# Altium PCB STM32F302VC_EVM.PcbDoc (part 1 of 19)
Units mil, origin at the board's own origin, x right, y up, seen from the top; angles counter-clockwise.
Board outline 3937.01 x 3937.01 mil, 2 copper layers (Top Layer, Bottom Layer); 117 components, 166 nets, 602 pads, 373 vias.
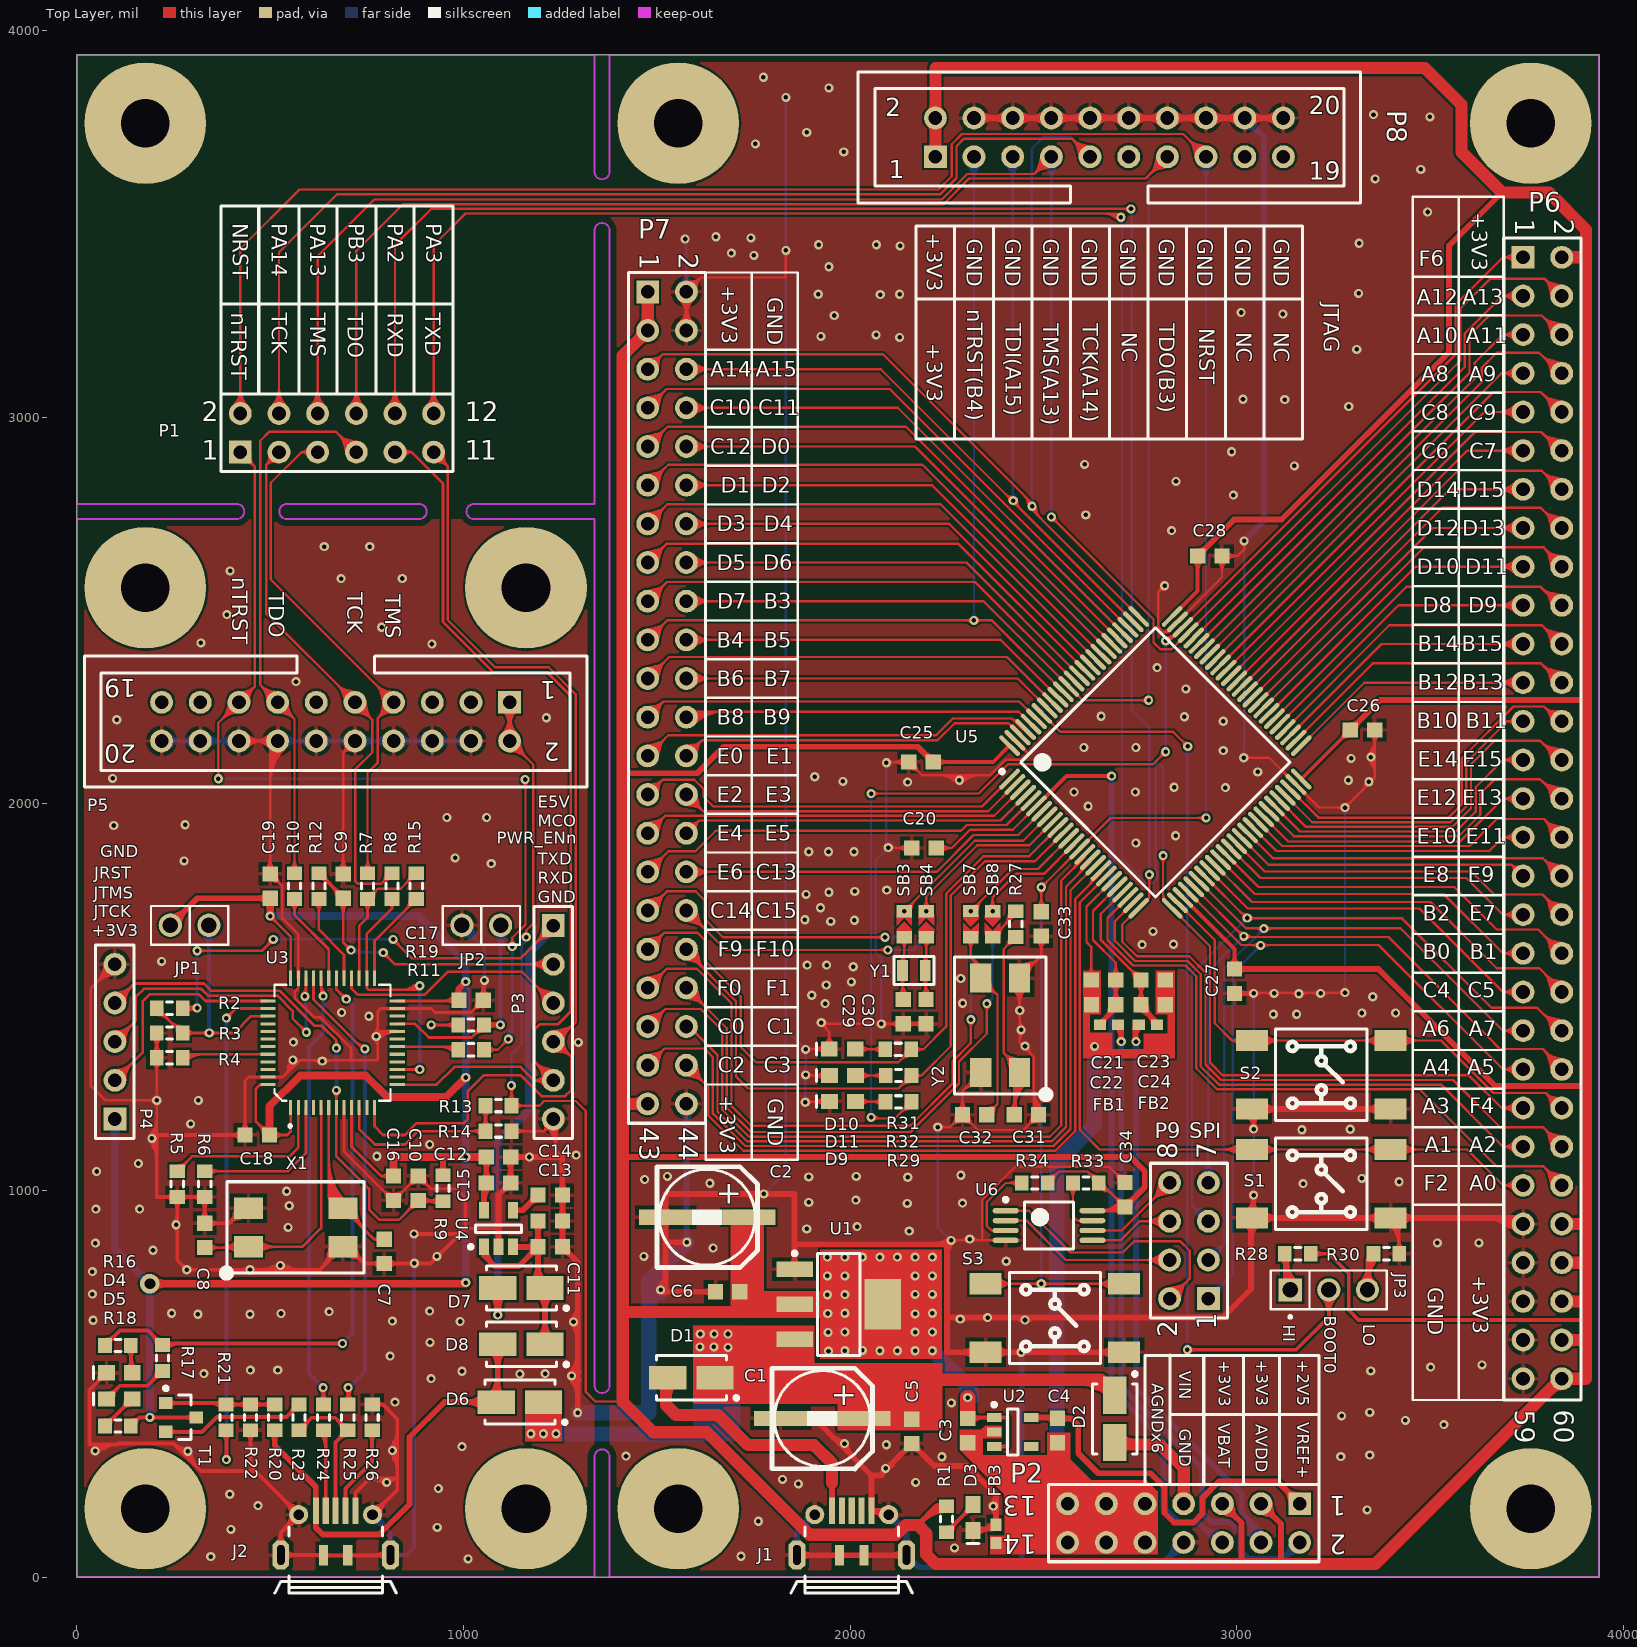
[diagram p0: Top Layer view]
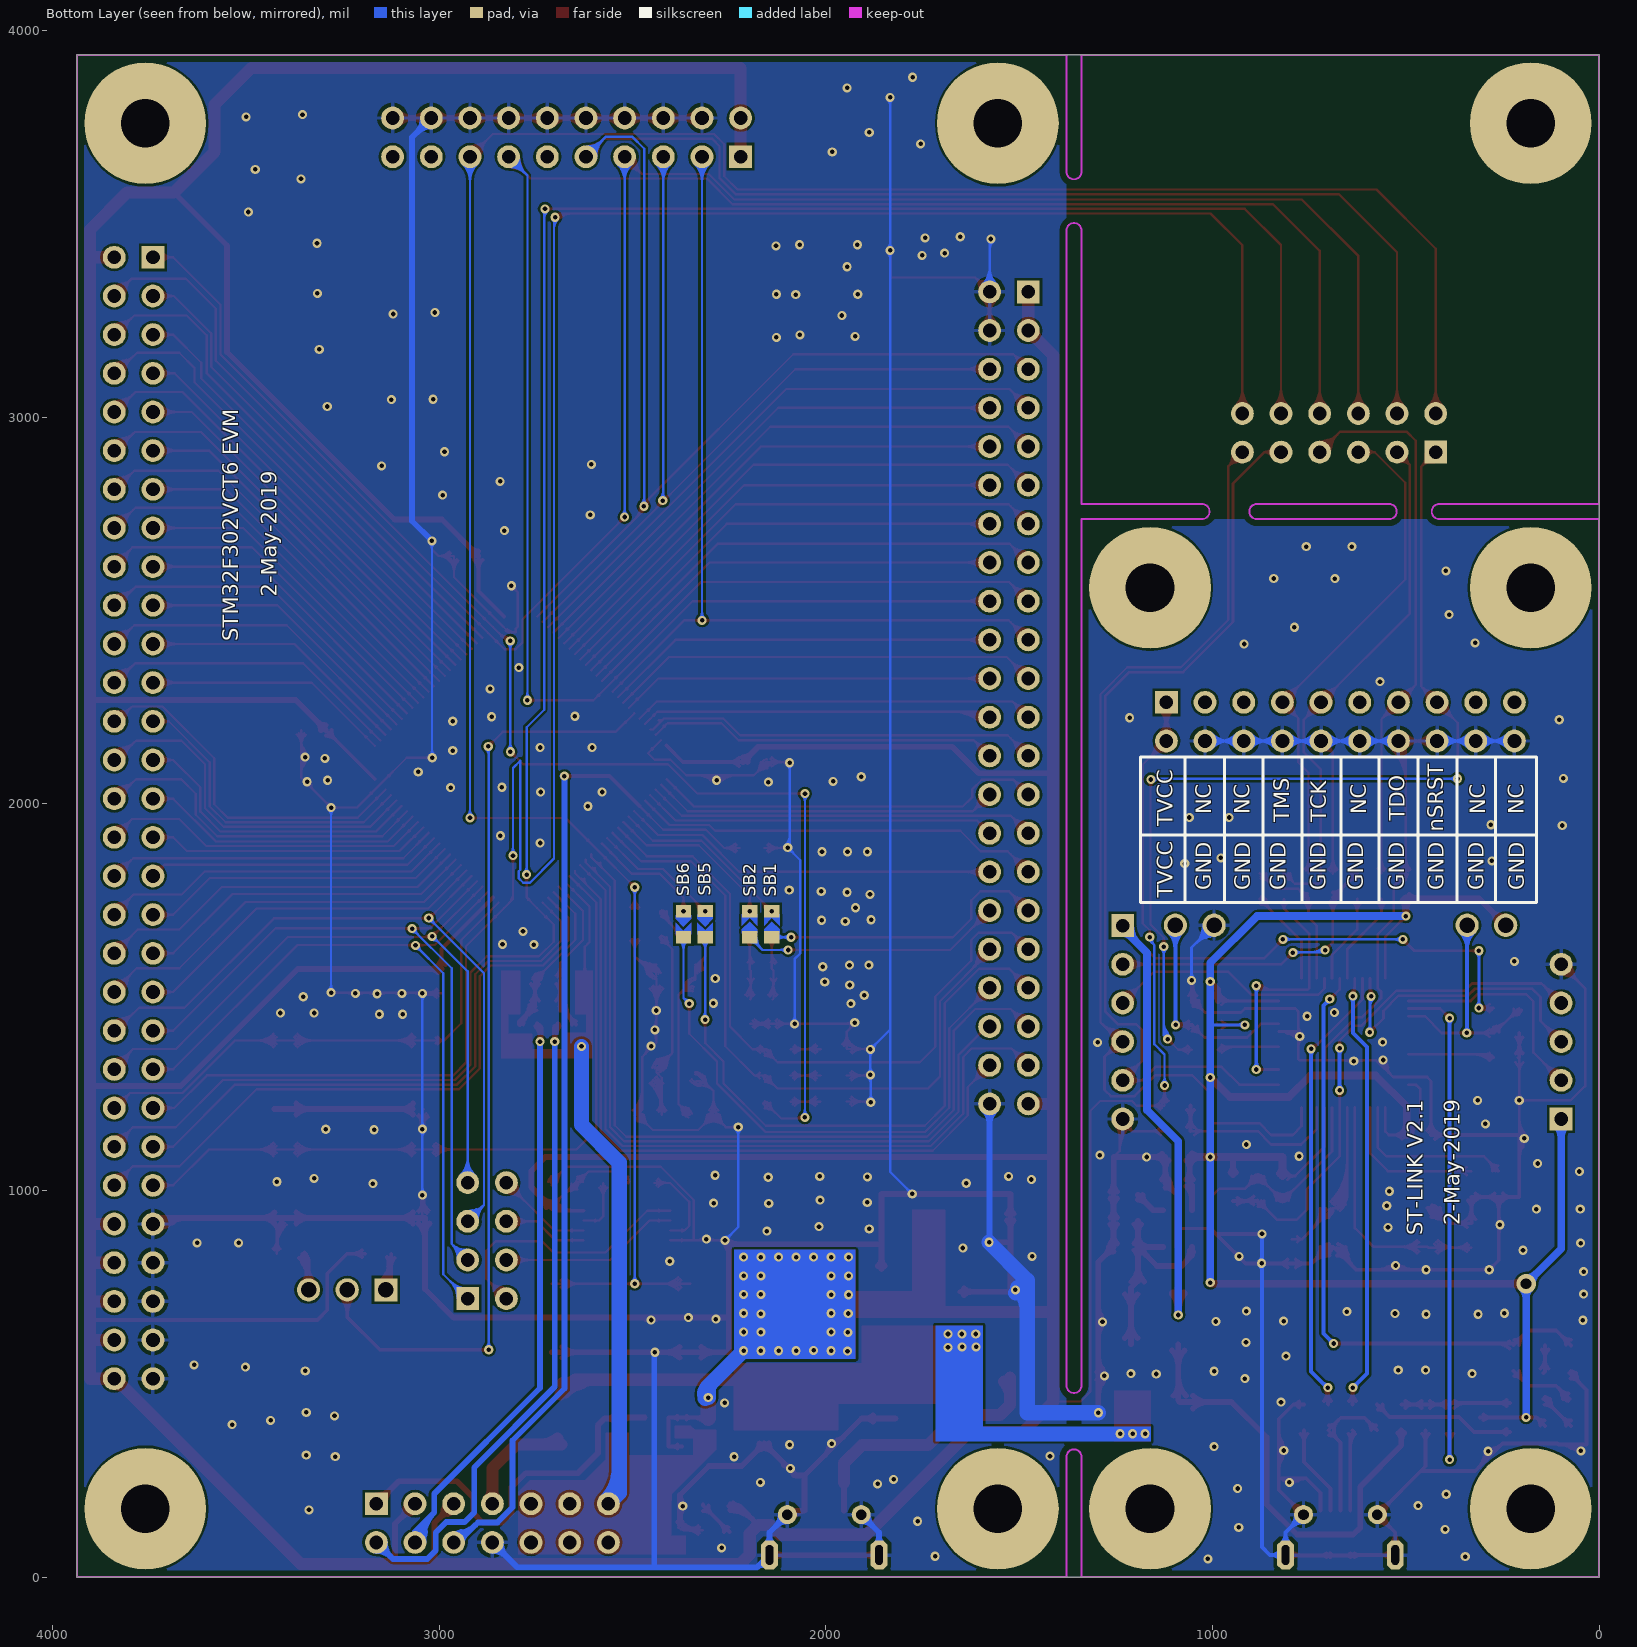
[diagram p1: Bottom Layer view, seen from below]

## Layer stack, top to bottom
Top Layer: signal copper 1.4
Dielectric: dielectric 12.6, FR-4, Dk 4.8
Bottom Layer: signal copper 1.4

## Board outline
0,3937.01 0,0 3937.01,0 3937.01,3937.01 0,3937.01

## Design rules (kind name [scope] priority, off if disabled: settings)
Clearance Clearance_keepout [All vs OnLayer('Keep-Out Layer')] p1: gap=15.75
Clearance [All] p2: gap=6
HoleSize [All] p1: absolutevalues=TRUE maxlimit=248.03 minlimit=7.87 maxpercent=80.000 minpercent=20.000
MinimumSolderMaskSliver [All] p1: minsoldermaskwidth=0
PolygonConnect PolygonConnect_ViaHole [IsVia] p1: connectstyle=Direct reliefconductorwidth=10 reliefentries=4 polygonreliefangle="90 Angle" airgapwidth=10
PolygonConnect [All] p2: connectstyle=Relief reliefconductorwidth=10 reliefentries=4 polygonreliefangle="90 Angle" airgapwidth=10
RoutingVias [All] p1: holewidth=11.81 width=23.62 viastyle="Through Hole" minholewidth=11.81 minwidth=23.62 maxholewidth=248.03 maxwidth=50
SilkToSilkClearance [All] p1: silktosilkclearance=0
SilkToSolderMaskClearance [IsPad] p1: minsilkscreentomaskgap=0 clearancetoexposedcopper=TRUE
SolderMaskExpansion [All] p1: expansion=4
Width [All] p1: maxlimit=50 minlimit=5 preferedwidth=10
24 further rules are at their usual default settings.

## Classes and differential pairs
component class STM32F302VC_EVM: P1
component class ST_LINK_V2-1: C7 C8 C9 C10 C11 C12 C13 C14 C15 C16 C17 C18 C19 D4 D5 D6 D7 D8 J2 JP1 JP2 P3 P4 P5 R2 R3 R4 R5 R6 R7 R8 R9 R10 R11 R12 R13 R14 R15 R16 R17 R18 R19 R20 R21 R22 R23 R24 R25 R26 T1 U3 U4 X1
component class PowerMgt: C1 C2 C3 C4 C5 C6 D1 D2 D3 FB1 FB2 FB3 J1 P2 R1 U1 U2
component class MCU: C20 C21 C22 C23 C24 C25 C26 C27 C28 C29 C30 C31 C32 C33 C34 D9 D10 D11 JP3 P6 P7 P8 P9 R27 R28 R29 R30 R31 R32 R33 R34 S1 S2 S3 SB1 SB2 SB3 SB4 SB5 SB6 SB7 SB8 U5 U6 Y1 Y2

## Components (designator, comment, footprint, x,y, rotation, side; value= is the part's Value field where it differs from the comment)
C1 "220uF" SMD-EC-F6.3 2035.43,410.43 r180 top
C2 "220uF" SMD-EC-F6.3 1738.19,931.1 r180 top
C3 "1uF" CAPC1608N 2304.13,378.94 r90 top
C4 "1uF" CAPC1608N 2536.42,379.33 r90 top
C5 "100nF" CAPC1608N 2159.45,376.97 r90 top
C6 "100nF" CAPC1608N 1683.07,738.19 r0 top
C7 "20pF" CAPC1608N 795.28,842.52 r270 top
C8 "20pF" CAPC1608N 330.71,883.86 r90 top
C9 "20pF" CAPC1608N 688.98,1787.4 r90 top
C10 "100nF" CAPC1608N 882.87,1005.91 r270 top
C11 "1uF" CAPC1608N 1224.41,854.33 r180 top
C12 "1uF" CAPC1608N 1090.55,1086.61 r180 top
C13 "100nF" CAPC1608N 1224.41,921.26 r180 top
C14 "10nF" CAPC1608N 1224.41,988.19 r180 top
C15 "100nF" CAPC1608N 1090.55,1019.68 r180 top
C16 "100nF" CAPC1608N 818.9,1005.91 r90 top
C17 "100nF" CAPC1608N 1019.68,1492.13 r180 top
C18 "100nF" CAPC1608N 466.54,1143.7 r0 top
C19 "100nF" CAPC1608N 500,1787.4 r270 top
C20 "100nF" CAPC1608N 2190.94,1885.83 r0 top
C21 "10nF" CAPC1608N 2655,1544.18 r0 top
C22 "1uF" CAPC1608N 2655.51,1480.33 r0 top
C23 "10nF" CAPC1608N 2783.46,1544.43 r180 top
C24 "1uF" CAPC1608N 2783.46,1480.45 r180 top
C25 "100nF" CAPC1608N 2183.07,2108.27 r0 top
C26 "100nF" CAPC1608N 3324.8,2190.94 r180 top
C27 "100nF" CAPC1608N 2994.09,1541.34 r90 top
C28 "100nF" CAPC1608N 2930.12,2640.75 r180 top
C29 "4.3pF" CAPC1608N 2137.17,1462.6 r90 top
C30 "4.3pF" CAPC1608N 2196.22,1462.6 r90 top
C31 "20pF" CAPC1608N 2455.71,1195.87 r180 top
C32 "20pF" CAPC1608N 2321.85,1195.87 r0 top
C33 "100nF" CAPC1608N 2494.09,1689.35 r90 top
C34 "100nF" CAPC1608N 2710.76,989.17 r270 top
D1 "STPS2L30A" DIOM4326X25N 1589.57,515.75 r180 top
D2 "STPS2L30A" DIOM4326X25N 2684.06,409.45 r270 top
D3 "LED-SMD0603-R" CD1608-0603 2317.91,154.53 r270 top
D4 "LED-SMD0603-R" CD1608-0603 110.17,528.54 r180 top
D5 "LED-SMD0603-G" CD1608-0603 110.17,460.63 r180 top
D6 "STPS2L30A" DIOM4326X25N 1145.67,452.76 r180 top
D7 "STPS2L30A" DIOM4326X25N 1149.61,748.03 r180 top
D8 "STPS2L30A" DIOM4326X25N 1149.61,602.36 r180 top
D9 "LED-SMD0603-R" CD1608-0603 1980.19,1230.32 r180 top
D10 "LED-SMD0603-G" CD1608-0603 1979.33,1366.14 r180 top
D11 "LED-SMD0603-B" CD1608-0603 1980.01,1297.24 r180 top
FB1 "BLM15PX800SN1D" FBC1005N 2669.29,1429.13 r180 top
FB2 "BLM15PX800SN1D" FBC1005N 2769.68,1429.13 r0 top
FB3 "BLM15PX800SN1D" FBC1005N 2376.97,112.2 r270 top
J1 "ZX62D-B-5P8(30)" USB2.0-4H5 2003.94,94.49 r0 top
J2 "ZX62D-B-5P8(30)" USB2.0-4H5 669.29,94.49 r0 top locked
JP1 "JP2" SIP2/2.54 241.76,1686.02 r0 top
JP2 "JP2" SIP2/2.54 996.06,1686.02 r0 top
JP3 "JP3" SIP3/2.54 3137.8,743.11 r0 top
P1 "Header 6X2" HDR2X6 422.83,2909.45 r0 top
P2 "PWR" HDR2X7 3162.4,189.96 r180 top
P3 "Header 6" HDR1X6 1232.28,1685.04 r270 top
P4 "Header 5" HDR1X5 98.43,1185.04 r90 top
P5 "JTAG/SWD" HDR2X10/T2.54/B2C 669.29,2212.6 r180 top
P6 "Header 30X2" HDR2X30 3740.16,3413.39 r270 top
P7 "Header 22X2" HDR2X22 1476.38,3324.02 r270 top
P8 "JTAG/SWD" HDR2X10/T2.54/B2C 2670.28,3723.43 r0 top
P9 "JP_EEPROM" HDR2X4 2926.18,720.47 r90 top
R1 "1K" RESC1608N 2249.02,150.1 r270 top
R2 "2K7" RESC1608N 240.16,1471.46 r180 top
R3 "4K7" RESC1608N 240.16,1407.48 r180 top
R4 "100K" RESC1608N 240.16,1343.5 r0 top
R5 "10K" RESC1608N 259.84,1016.73 r90 top
R6 "10K" RESC1608N 330.71,1016.73 r90 top
R7 "22" RESC1608N 751.97,1787.4 r90 top
R8 "22" RESC1608N 814.96,1787.4 r90 top
R9 "100K" RESC1608N 946.85,1005.91 r90 top
R10 "22" RESC1608N 562.99,1787.4 r90 top
R11 "22" RESC1608N 1019.68,1364.17 r0 top
R12 "100" RESC1608N 625.98,1787.4 r90 top
R13 "4K7" RESC1608N 1090.55,1219.49 r180 top
R14 "4K7" RESC1608N 1090.55,1153.54 r180 top
R15 "100" RESC1608N 877.95,1787.4 r90 top
R16 "100" RESC1608N 106.3,599.41 r180 top
R17 "100" RESC1608N 221.46,566.93 r90 top
R18 "0" RESC1608N 106.3,390.75 r180 top
R19 "[N/A]" RESC1608N 1019.68,1428.15 r0 top
R20 "10K" RESC1608N 511.81,413.39 r270 top
R21 "100" RESC1608N 385.83,413.39 r270 top
R22 "36K" RESC1608N 448.82,413.39 r90 top
R23 "1K5" RESC1608N 574.8,413.39 r90 top
R24 "0" RESC1608N 637.8,413.39 r90 top
R25 "0" RESC1608N 700.79,413.39 r90 top
R26 "100K" RESC1608N 763.78,413.39 r90 top
R27 "0" RESC1608N 2428.15,1688.98 r90 top
R28 "10K" RESC1608N 3157.48,836.61 r0 top
R29 "1K" RESC1608N 2125,1229.33 r180 top
R30 "10K" RESC1608N 3386.81,836.61 r0 top
R31 "1K" RESC1608N 2124.14,1365.16 r180 top
R32 "1K" RESC1608N 2125.13,1297.24 r180 top
R33 "10K" RESC1608N 2609.45,1019.68 r0 top
R34 "10K" RESC1608N 2477.36,1019.68 r180 top
S1 "FSM4JSMASTR" SW_4PIN_S_6.0X6.0MM 3218.5,1017.72 r270 top
S2 "FSM4JSMASTR" SW_4PIN_S_6.0X6.0MM 3218.5,1299.21 r270 top
S3 "FSM4JSMASTR" SW_4PIN_S_6.0X6.0MM 2529.53,670.28 r270 top
SB1 "Circuit Breaker" JP2_SMD 2139.76,1688.84 r270 bottom
SB2 "Circuit Breaker" JP2_SMD 2196.85,1688.84 r270 bottom
SB3 "Circuit Breaker" JP2_SMD 2139.76,1688.84 r270 top
SB4 "Circuit Breaker" JP2_SMD 2196.85,1688.84 r270 top
SB5 "Circuit Breaker" JP2_SMD 2312.01,1688.98 r90 bottom
SB6 "Circuit Breaker" JP2_SMD 2368.11,1688.63 r90 bottom
SB7 "Circuit Breaker" JP2_SMD 2312.01,1688.98 r90 top
SB8 "Circuit Breaker" JP2_SMD 2368.11,1688.63 r90 top
T1 "MMBT3904LT1G" ONSC-SOT-23-3-318-08_V 269.68,413.39 r0 top
U1 "LD1117S33TR" SOT-223_N 1970.47,705.71 r0 top
U2 "LDLN025M25R" SOT95P280X145-5N 2420.28,375.39 r0 top
U3 "STM32F103CBT6" "QFP48 7X7" 661.42,1381.89 r0 top
U4 "LD3985M33R" SOT23-5L_N 1090.55,901.57 r90 top
U5 "STM32F302VCT6" STM-LQFP100_N 2789.37,2107.28 r45 top
U6 "M95640-WDW6TP" TSOP65P640X120-8N 2514.25,909.45 r0 top
X1 "8MHz" 12SMX-B-N 565.94,904.53 r0 top
Y1 "32.768kHz" FC-12M 2164.72,1568.9 r180 top
Y2 "8MHz" 12SMX-B-N 2387.8,1427.04 r90 top

## Footprints (in the part's own frame and the unit in brackets; to place one, negate y for a bottom-side part, rotate by r counter-clockwise, add the part's x,y. Pads: shape width x height; smd on the part's side, far side on the other; paste and mask are expansions set on the pad)
12SMX-B-N [mm] "SMD 4-Pin, Body 7x5mm, IPC Medium Density"
  rect 1.9x1.4 smd: 1(-3.1,-1.27) 2(3.1,-1.27) 3(3.1,1.27) 4(-3.1,1.27)
  silkscreen extent -4.64,-3.1 4.5,3, body extent -3.5,-2.5 3.5,2.5, height 0.6
CAPC1608N [mm] "Chip Capacitor, Body 1.6x0.8mm, IPC Medium Density"
  rect 1x1 smd: 1(-0.8,0) 2(0.8,0)
  body extent -0.87,-0.48 0.87,0.48, height 0.85
CD1608-0603 [mm] "Chip Diode; Body 1.6 x 0.8 mm (LxW typ)"
  rect 1.1x1 smd: 1(-0.85,0) 2(0.85,0)
  silkscreen extent 1.7,-0.4 1.7,0.4
DIOM4326X25N [mm] "Molded Diode, 2-Leads, Body 4.27x2.57mm, IPC Medium Density"
  rect 2.45x1.55 smd: 1(-1.55,0) 2(1.55,0)
  silkscreen extent -3.08,-1.45 2.3,1.45, body extent -2.3,-1.45 2.3,1.45, height 2.45
FBC1005N [mm] "Chip Ferrite Bead, Body 1.1x0.5mm, IPC Medium Density"
  rect 0.8x0.7 smd: 1(-0.6,0) 2(0.6,0)
  body extent -0.55,-0.3 0.55,0.3, height 0.4
FC-12M [mm] "Chip Crystal, SMD 2-Pin, Body 2.05x1.20mm, IPC Medium Density"
  rect 0.7x1.4 smd: 1(-0.75,0) 2(0.75,0)
  silkscreen extent -1.32,-0.91 1.32,0.91, body extent -1.03,-0.6 1.02,0.6, height 0.55
HDR1X5 [mm] "Connector; Header; 5 Position"
  rect 1.5x1.5 hole 0.9: 1(0,0)
  round 1.5 hole 0.9: 2(2.54,0) 3(5.08,0) 4(7.62,0) 5(10.16,0)
  silkscreen extent -1.27,-1.27 11.43,1.27
HDR1X6 [mm] "Connector; Header; 6 Position"
  rect 1.5x1.5 hole 0.9: 1(0,0)
  round 1.5 hole 0.9: 2(2.54,0) 3(5.08,0) 4(7.62,0) 5(10.16,0) 6(12.7,0)
  silkscreen extent -1.27,-1.27 13.97,1.27
HDR2X4 [mm] "Connector; Header; 4x2 Position"
  rect 1.5x1.5 hole 0.9: 1(0,0)
  round 1.5 hole 0.9: 2(0,2.54) 3(2.54,0) 4(2.54,2.54) 5(5.08,0) 6(5.08,2.54) 7(7.62,0) 8(7.62,2.54)
  silkscreen extent -1.27,-1.27 8.89,3.81
HDR2X6 [mm] "Connector; Header; 6x2 Position"
  rect 1.5x1.5 hole 0.9: 1(0,0)
  round 1.5 hole 0.9: 2(0,2.54) 3(2.54,0) 4(2.54,2.54) 5(5.08,0) 6(5.08,2.54) 7(7.62,0) 8(7.62,2.54) 9(10.16,0) 10(10.16,2.54) 11(12.7,0) 12(12.7,2.54)
  silkscreen extent -1.27,-1.27 13.97,3.81
HDR2X7 [mm] "Connector; Header; 7x2 Position"
  rect 1.5x1.5 hole 0.9: 1(0,0)
  round 1.5 hole 0.9: 2(0,2.54) 3(2.54,0) 4(2.54,2.54) 5(5.08,0) 6(5.08,2.54) 7(7.62,0) 8(7.62,2.54) 9(10.16,0) 10(10.16,2.54) 11(12.7,0) 12(12.7,2.54) 13(15.24,0) 14(15.24,2.54)
  silkscreen extent -1.27,-1.27 16.51,3.81
HDR2X10/T2.54/B2C [mm] "Connector; Header; 10x2 Position; Pitch 2.54mm; Style Board to Cable;"
  rect 1.5x1.5 hole 0.9: 1(-11.43,-1.27)
  round 1.5 hole 0.9: 2(-11.43,1.27) 3(-8.89,-1.27) 4(-8.89,1.27) 5(-6.35,-1.27) 6(-6.35,1.27) 7(-3.81,-1.27) 8(-3.81,1.27) 9(-1.27,-1.27) 10(-1.27,1.27) 11(1.27,-1.27) 12(1.27,1.27) 13(3.81,-1.27) 14(3.81,1.27) 15(6.35,-1.27) 16(6.35,1.27) 17(8.89,-1.27) 18(8.89,1.27) 19(11.43,-1.27) 20(11.43,1.27)
  silkscreen extent -16.5,-4.3 16.5,4.3
HDR2X22 [mm] "Connector; Header; 22x2 Position"
  rect 1.5x1.5 hole 0.9: 1(0,0)
  round 1.5 hole 0.9: 2(0,2.54) 3(2.54,0) 4(2.54,2.54) 5(5.08,0) 6(5.08,2.54) 7(7.62,0) 8(7.62,2.54) 9(10.16,0) 10(10.16,2.54) 11(12.7,0) 12(12.7,2.54) 13(15.24,0) 14(15.24,2.54) 15(17.78,0) 16(17.78,2.54) 17(20.32,0) 18(20.32,2.54) 19(22.86,0) 20(22.86,2.54) 21(25.4,0) 22(25.4,2.54) 23(27.94,0) 24(27.94,2.54) 25(30.48,0) 26(30.48,2.54) 27(33.02,0) 28(33.02,2.54) 29(35.56,0) 30(35.56,2.54) 31(38.1,0) 32(38.1,2.54) 33(40.64,0) 34(40.64,2.54) 35(43.18,0) 36(43.18,2.54) 37(45.72,0) 38(45.72,2.54) 39(48.26,0) 40(48.26,2.54) 41(50.8,0) 42(50.8,2.54) 43(53.34,0) 44(53.34,2.54)
  silkscreen extent -1.27,-1.27 54.61,3.81
HDR2X30 [mm] "Connector; Header; 30x2 Position"
  rect 1.5x1.5 hole 0.9: 1(0,0)
  round 1.5 hole 0.9: 2(0,2.54) 3(2.54,0) 4(2.54,2.54) 5(5.08,0) 6(5.08,2.54) 7(7.62,0) 8(7.62,2.54) 9(10.16,0) 10(10.16,2.54) 11(12.7,0) 12(12.7,2.54) 13(15.24,0) 14(15.24,2.54) 15(17.78,0) 16(17.78,2.54) 17(20.32,0) 18(20.32,2.54) 19(22.86,0) 20(22.86,2.54) 21(25.4,0) 22(25.4,2.54) 23(27.94,0) 24(27.94,2.54) 25(30.48,0) 26(30.48,2.54) 27(33.02,0) 28(33.02,2.54) 29(35.56,0) 30(35.56,2.54) 31(38.1,0) 32(38.1,2.54) 33(40.64,0) 34(40.64,2.54) 35(43.18,0) 36(43.18,2.54) 37(45.72,0) 38(45.72,2.54) 39(48.26,0) 40(48.26,2.54) 41(50.8,0) 42(50.8,2.54) 43(53.34,0) 44(53.34,2.54) 45(55.88,0) 46(55.88,2.54) 47(58.42,0) 48(58.42,2.54) 49(60.96,0) 50(60.96,2.54) 51(63.5,0) 52(63.5,2.54) 53(66.04,0) 54(66.04,2.54) 55(68.58,0) 56(68.58,2.54) 57(71.12,0) 58(71.12,2.54) 59(73.66,0) 60(73.66,2.54)
  silkscreen extent -1.27,-1.27 75.06,3.81
JP2_SMD [mil]
  rect 32x40 smd: 1(33.75,0) 2(-33.75,0)
  Top Layer region: -26.25,0 -16.25,0 3.75,-20 -26.25,-20
  Top Layer region: -26.25,0 -16.25,0 3.75,20 -26.25,20
  Top Layer region: 23.75,20 13.75,20 -6.25,0 13.75,-20 23.75,-20
ONSC-SOT-23-3-318-08_V [mm] "SOT23, 3-Leads, Body 2.92x1.3mm, Pitch 0.95mm"
  rect 0.9x0.8 smd: 1(-1,0.95) 2(-1,-0.95) 3(1,0)
  silkscreen extent -1.12,-1.46 0.65,2.02, body extent -0.65,-1.46 0.65,1.46, height 1.11
"QFP48 7X7" [mm] "TSQFP, 48-Leads, Body 7.0x7.0mm (max), Pitch 0.50mm, IPC Medium Density"
  rect 0.2x1 smd: 1(-2.75,-4.25) 2(-2.25,-4.25) 3(-1.75,-4.25) 4(-1.25,-4.25) 5(-0.75,-4.25) 6(-0.25,-4.25) 7(0.25,-4.25) 8(0.75,-4.25) 9(1.25,-4.25) 10(1.75,-4.25) 11(2.25,-4.25) 12(2.75,-4.25) 25(2.75,4.25) 26(2.25,4.25) 27(1.75,4.25) 28(1.25,4.25) 29(0.75,4.25) 30(0.25,4.25) 31(-0.25,4.25) 32(-0.75,4.25) 33(-1.25,4.25) 34(-1.75,4.25) 35(-2.25,4.25) 36(-2.75,4.25)
  rect 1x0.2 smd: 13(4.25,-2.75) 14(4.25,-2.25) 15(4.25,-1.75) 16(4.25,-1.25) 17(4.25,-0.75) 18(4.25,-0.25) 19(4.25,0.25) 20(4.25,0.75) 21(4.25,1.25) 22(4.25,1.75) 23(4.25,2.25) 24(4.25,2.75) 37(-4.25,2.75) 38(-4.25,2.25) 39(-4.25,1.75) 40(-4.25,1.25) 41(-4.25,0.75) 42(-4.25,0.25) 43(-4.25,-0.25) 44(-4.25,-0.75) 45(-4.25,-1.25) 46(-4.25,-1.75) 47(-4.25,-2.25) 48(-4.25,-2.75)
  silkscreen extent -3.81,-5.52 3.81,3.81
RESC1608N [mm] "Chip Resistor, Body 1.6x0.8mm, IPC Medium Density"
  rect 0.9x1 smd: 1(-0.85,0) 2(0.85,0)
  silkscreen extent -0.2,-0.4 0.2,0.4, body extent -0.85,-0.48 0.85,0.48, height 0.6
SIP2/2.54 [mil]
  round 60 hole 40: 1(0,0) 2(100,0)
  silkscreen extent -50,-50 150,50
SIP3/2.54 [mil]
  rect 60x60 hole 40: 1(0,0)
  round 60 hole 40: 2(100,0) 3(200,0)
  silkscreen extent -50,-72 250,50
SMD-EC-F6.3 [mm]
  rect 3.5x1 smd: 1(0,0) 2(5.475,0)
  silkscreen extent -0.56,-3.31 6.04,3.31
SOT23-5L_N [mm] "SOT23, 5-Leads, Body 2.9x1.6mm, Pitch 0.95mm, Lead Span 2.8mm, IPC Medium Density"
  rect 1.1x0.65 smd: 1(-1.2,0.95) 2(-1.2,0) 3(-1.2,-0.95) 4(1.2,-0.95) 5(1.2,0.95)
  silkscreen extent -1.32,-1.5 0.25,1.95, body extent -0.87,-1.5 0.87,1.5, height 1.45
SOT95P280X145-5N [mm] "SOT23, 5-Leads, Body 2.95x2.80mm, Pitch 0.95mm, IPC Medium Density"
  rect 0.95x0.6 smd: 1(-1.225,0.95) 2(-1.225,0) 3(-1.225,-0.95) 4(1.225,-0.95) 5(1.225,0.95)
  silkscreen extent -1.35,-1.5 0.35,1.92, body extent -0.8,-1.47 0.8,1.48, height 1.45
SOT-223_N [mm] "SOT223, 4-Leads, Body 6.5x3.5mm, Pitch 2.3mm, Lead Span 7mm, IPC Medium Density"
  rect 2.4x1 smd: 1(-2.9,2.3) 2(-2.9,0) 3(-2.9,-2.3)
  rect 2.4x3.3 smd: 4(2.9,0)
  silkscreen extent -3.02,-3.35 1.4,3.47, body extent -1.85,-3.35 1.85,3.35, height 1.8
STM-LQFP100_N [mm] "Thin QFP, 100-Leads, Body 14x14mm, Pitch 0.5mm, IPC Medium Density"
  oval 1.8x0.3 smd: 1(-7.55,6) 2(-7.55,5.5) 3(-7.55,5) 4(-7.55,4.5) 5(-7.55,4) 6(-7.55,3.5) 7(-7.55,3) 8(-7.55,2.5) 9(-7.55,2) 10(-7.55,1.5) 11(-7.55,1) 12(-7.55,0.5) 13(-7.55,0) 14(-7.55,-0.5) 15(-7.55,-1) 16(-7.55,-1.5) 17(-7.55,-2) 18(-7.55,-2.5) 19(-7.55,-3) 20(-7.55,-3.5) 21(-7.55,-4) 22(-7.55,-4.5) 23(-7.55,-5) 24(-7.55,-5.5) 25(-7.55,-6) 51(7.55,-6) 52(7.55,-5.5) 53(7.55,-5) 54(7.55,-4.5) 55(7.55,-4) 56(7.55,-3.5) 57(7.55,-3) 58(7.55,-2.5) 59(7.55,-2) 60(7.55,-1.5) 61(7.55,-1) 62(7.55,-0.5) 63(7.55,0) 64(7.55,0.5) 65(7.55,1) 66(7.55,1.5) 67(7.55,2) 68(7.55,2.5) 69(7.55,3) 70(7.55,3.5) 71(7.55,4) 72(7.55,4.5) 73(7.55,5) 74(7.55,5.5) 75(7.55,6)
  oval 0.3x1.8 smd: 26(-6,-7.55) 27(-5.5,-7.55) 28(-5,-7.55) 29(-4.5,-7.55) 30(-4,-7.55) 31(-3.5,-7.55) 32(-3,-7.55) 33(-2.5,-7.55) 34(-2,-7.55) 35(-1.5,-7.55) 36(-1,-7.55) 37(-0.5,-7.55) 38(0,-7.55) 39(0.5,-7.55) 40(1,-7.55) 41(1.5,-7.55) 42(2,-7.55) 43(2.5,-7.55) 44(3,-7.55) 45(3.5,-7.55) 46(4,-7.55) 47(4.5,-7.55) 48(5,-7.55) 49(5.5,-7.55) 50(6,-7.55) 76(6,7.55) 77(5.5,7.55) 78(5,7.55) 79(4.5,7.55) 80(4,7.55) 81(3.5,7.55) 82(3,7.55) 83(2.5,7.55) 84(2,7.55) 85(1.5,7.55) 86(1,7.55) 87(0.5,7.55) 88(0,7.55) 89(-0.5,7.55) 90(-1,7.55) 91(-1.5,7.55) 92(-2,7.55) 93(-2.5,7.55) 94(-3,7.55) 95(-3.5,7.55) 96(-4,7.55) 97(-4.5,7.55) 98(-5,7.55) 99(-5.5,7.55) 100(-6,7.55)
  silkscreen extent -7.67,-6.25 6.25,6.82, body extent -7,-7 7,7, height 1.6
SW_4PIN_S_6.0X6.0MM [mm] "SMD 4-Pin, Body 7x5mm, IPC Medium Density"
  rect 1.4x2.1 smd: 1(2.25,4.55) 2(2.25,-4.55) 3(-2.25,4.55) 4(-2.25,-4.55)
  silkscreen extent -3,-3 3,3, body extent -3,-3 3,3, height 0.6
TSOP65P640X120-8N [mm] "TSOP, 8-Leads, Body 3.00x4.40mm, Pitch 0.65mm, IPC Medium Density"
  oval 1.7x0.35 smd: 1(-2.85,0.975) 2(-2.85,0.325) 3(-2.85,-0.325) 4(-2.85,-0.975) 5(2.85,-0.975) 6(2.85,-0.325) 7(2.85,0.325) 8(2.85,0.975)
  silkscreen extent -2.97,-1.55 1.6,1.82, body extent -2.25,-1.55 2.25,1.55, height 1.2
USB2.0-4H5 [mm] "USB Micro B, 0.65mm Pitch, 4 holes"
  rect 0.4x1.75 smd: 1(-1.3,1.962) 2(-0.65,1.962) 3(0,1.962) 4(0.65,1.962) 5(1.3,1.962)
  oct 1.1x1.9 hole 0.5 slot 1.3 at 90 deg: 6(3.6,-0.938) 7(-3.6,-0.938)
  round 1.25 hole 0.7: 8(2.425,1.712) 9(-2.425,1.712)
  rect 0.6x1.35 smd: 10(0.8,-0.963) 11(-0.8,-0.963)
  silkscreen extent -4,-3.45 4,0.91, body extent -4,-3.46 4,2.36, height 16

## Part data
C1 C2: library part EEE-FPC221XAP, "220μF 16V Aluminum Electrolytic Capacitors Radial, Can - SMD 160 mohm @ 100kHz 2000 Hrs @ 105°C"
C3 C4 C5 C6 C7 C8 C9 C10 C11 C12 C13 C14 C15 C16 C17 C18 C19 C20 C21 C22 C23 C24 C25 C26 C27 C28 C29 C30 C31 C32 C33 C34: library part "Chip Capacitor", "Chip Capacitor"
D1 D2 D6 D7 D8: "Diode Schottky 30V 2A Surface Mount SMA"
D3 D4 D9: "Single Color LED Indication, 0603, Red"
D5 D10: "Single Color LED Indication, 0603, Green"
D11: "Single Color LED Indication, 0603, Blue"
FB1 FB2 FB3: library part "Ferrite Bead", "80 Ohms @ 100MHz 1 Power Line Ferrite Bead 0402 (1005 Metric) 2.3A 38mOhm"
J1 J2: "USB - micro B USB 2.0 Receptacle Connector 5-Pin"
JP1 JP2: "Jumper 2"
JP3: "Jumper 3"
P1: "Header, 6-Pin, Dual row"
P2: library part "Header 7X2", "Header, 7-Pin, Dual row"
P3: "Header, 6-Pin"
P4: "Header, 5-Pin"
P5 P8: library part JTAG, "Header, JTAG"
P6: "Header, 30-Pin, Dual row"
P7: "Header, 22-Pin, Dual row"
P9: library part "Header 4X2", "Header, 4-Pin, Dual row"
R1 R2 R3 R4 R5 R6 R7 R8 R9 R10 R11 R12 R13 R14 R15 R16 R17 R18 R19 R20 R21 R22 R23 R24 R25 R26 R27 R28 R29 R30 R31 R32 R33 R34: library part "Chip Resistor", "Chip Resistor"
S1 S2 S3: "Tactile Switch SPST-NO Top Actuated Surface Mount"
T1: "General Purpose Transistor, NPN Silicon, 3-Pin SOT-23, Pb-Free, Tape and Reel"
U1: "Fixed Low Drop Positive Voltage Regulator, 3.3V, 4-Pin SOT-223, Tape and Reel"
U2: "Linear Voltage Regulator IC  1 Output  250mA SOT-23-5"
U3: "Medium-density performance line ARM-based 32-bit MCU with 64KB Flash"
U4: "150mA, Ultra-Low Drop Low Noise BiCMOS Voltage Regulators Low ESR Capacitors Compatible, 3.3V, 5-Pin SOT23-5L"
U5: "ARM Cortex-M4 32-bit MCU, 256 KB Flash, 32 KB Internal RAM, 87 I/Os, 100-pin LQFP, -40 to 85 degC, Tray"
U6: "EEPROM Memory IC 64Kb (8K x 8) SPI 20MHz 8-TSSOP"
X1 Y2: library part LFXTAL056516REEL, "8MHz ±30ppm Crystal 12pF 80 Ohms 4-SMD, No Lead"
Y1: library part "FC-12M 32.7680KA-A5", "32.768kHz ±20ppm Crystal 12.5pF 90 kOhms 2-SMD, No Lead"

## Free pads (board coordinates)
  round 314.96 hole 125.98 paste+0 mask+0: 0(177.17,177.17) 0(177.17,2559.06) 0(177.17,3759.84) 0(1161.42,177.17) 0(1161.42,2559.06) 0(1555.12,177.17) 0(1555.12,3759.84) 0(3759.84,177.17) 0(3759.84,3759.84)

## Via types
v1: diameter 23.62, hole 11.81, Top Layer to Bottom Layer, tented both sides, 372 vias
v2: diameter 50, hole 28, Top Layer to Bottom Layer, tented both sides, 1 vias

## Nets (pads, with @x,y where several pads share a name; then routed paths per layer and width w, separated by ;. In a path a pad name is that pad's centre, name@x,y a point inside that pad or via, vN(x,y) a via of type N, cw(c..) or ccw(c..) an arc to the next point about the centre after c; other vN are vias at no path point)
+3V3_ST_LINK: C12.2 C15.2 C16.2 C17.2 C18.2 C19.2 JP1.1 P4.1 R9.2 R18.1 R19.1 T1.3 U3.1 U3.9 U3.24 U3.36 U3.48 U4.5 | length 10019
  Top Layer w7: U3.48@494.09,1273.62 473.43,1273.62 462.97,1263.17 462.97,1178.76 C18.2@498.03,1143.7 544.17,1143.7 553.15,1152.68 U3.1@553.15,1214.57 ; v1(500,1709.65) 553.15,1656.5 U3.36@553.15,1549.21 ; U3.9@710.63,1214.57 710.63,1113.19 786.42,1037.4 ; C16.2@818.9,1037.4 786.42,1037.4 ; U3.24@828.74,1490.16 986.22,1490.16 C17.2@988.19,1492.13 ; v1(916.34,1428.15) R19.1@986.22,1428.15 ; R19.1@986.22,1429.13 R19.1@988.19,1431.1 ; 469.2,1269.4 cw(c478.35,1260.25) U3.48@478.35,1273.19 ; 469.2,1269.4 cw(c478.35,1260.25) U3.48@478.35,1273.19 ; 469.2,1269.4 cw(c478.35,1260.25) U3.48@478.35,1273.19 ; 470.4,1171.33 cw(c442.77,1143.7) C18.2@481.85,1143.7 ; 470.4,1171.33 ccw(c498.03,1198.96) C18.2@498.03,1159.89 ; 470.4,1171.33 ccw(c498.03,1198.96) C18.2@498.03,1159.89 ; 470.4,1171.33 cw(c442.77,1143.7) C18.2@481.85,1143.7 ; 470.4,1171.33 ccw(c498.03,1198.96) C18.2@498.03,1159.89 ; 470.4,1171.33 cw(c442.77,1143.7) C18.2@481.85,1143.7 ; C18.2@482.35,1159.38 cw(c466.67,1143.7) C18.2@488.85,1143.7 ; C18.2@482.35,1159.38 ccw(c498.03,1175.06) C18.2@498.03,1152.89 ; C18.2@482.35,1159.38 ccw(c498.03,1175.06) C18.2@498.03,1152.89 ; C18.2@482.35,1159.38 cw(c466.67,1143.7) C18.2@488.85,1143.7 ; C18.2@482.35,1159.38 ccw(c498.03,1175.06) C18.2@498.03,1152.89 ; C18.2@482.35,1159.38 cw(c466.67,1143.7) C18.2@488.85,1143.7 ; C18.2@485.17,1163.33 cw(c478.85,1139.77) C18.2@502.75,1144.67 ; C18.2@485.17,1163.33 cw(c478.85,1139.77) C18.2@502.75,1144.67 ; C18.2@485.17,1163.33 cw(c478.85,1139.77) C18.2@502.75,1144.67 ; v1@499.74,1708.36 cw(c496.61,1693.09) 511.67,1697.13 ; v1@499.74,1708.36 cw(c496.61,1693.09) 511.67,1697.13 ; v1@499.74,1708.36 cw(c496.61,1693.09) 511.67,1697.13 ; v1@500,1701.33 cw(c500,1681.27) 514.19,1695.46 ; v1@500,1701.33 cw(c500,1681.27) 514.19,1695.46 ; v1@500,1701.33 cw(c500,1681.27) 514.19,1695.46 ; v1@501.28,1709.91 ccw(c516.55,1713.04) 512.52,1697.98 ; v1@501.28,1709.91 ccw(c516.55,1713.04) 512.52,1697.98 ; v1@501.28,1709.91 ccw(c516.55,1713.04) 512.52,1697.98 ; C18.2@504.53,1137.21 cw(c520.21,1121.53) 520.21,1143.7 ; C18.2@504.53,1137.21 cw(c520.21,1121.53) 520.21,1143.7 ; C18.2@504.53,1137.21 cw(c520.21,1121.53) 520.21,1143.7 ; C18.2@504.53,1150.2 ccw(c520.21,1165.88) 520.21,1143.7 ; C18.2@504.53,1150.2 ccw(c520.21,1165.88) 520.21,1143.7 ; C18.2@504.53,1150.2 ccw(c520.21,1165.88) 520.21,1143.7 ; v1@508.31,1709.65 ccw(c528.38,1709.65) 514.19,1695.46 ; v1@508.31,1709.65 ccw(c528.38,1709.65) 514.19,1695.46 ; v1@508.31,1709.65 ccw(c528.38,1709.65) 514.19,1695.46 ; C18.2@509.48,1132.26 cw(c537.11,1104.63) 537.11,1143.7 ; C18.2@509.48,1132.26 cw(c537.11,1104.63) 537.11,1143.7 ; C18.2@509.48,1132.26 cw(c537.11,1104.63) 537.11,1143.7 ; C18.2@509.48,1155.15 ccw(c537.11,1182.77) 537.11,1143.7 ; C18.2@509.48,1155.15 ccw(c537.11,1182.77) 537.11,1143.7 ; C18.2@509.48,1155.15 ccw(c537.11,1182.77) 537.11,1143.7 ; 786.42,1037.4 cw(c786.42,1012.91) C16.2@805.98,1027.66 ; 786.42,1037.4 ccw(c786.42,1061.9) C16.2@805.98,1047.15 ; 786.42,1037.4 ccw(c786.42,1061.9) C16.2@805.98,1047.15 ; 786.42,1037.4 cw(c786.42,1012.91) C16.2@805.98,1027.66 ; 786.42,1037.4 ccw(c786.42,1061.9) C16.2@805.98,1047.15 ; 786.42,1037.4 cw(c786.42,1012.91) C16.2@805.98,1027.66 ; v1@922.22,1422.27 cw(c936.4,1408.09) 936.4,1428.15 ; v1@922.22,1422.27 cw(c936.4,1408.09) 936.4,1428.15 ; v1@922.22,1422.27 cw(c936.4,1408.09) 936.4,1428.15 ; v1@922.22,1434.03 ccw(c936.4,1448.21) 936.4,1428.15 ; v1@922.22,1434.03 ccw(c936.4,1448.21) 936.4,1428.15 ; v1@922.22,1434.03 ccw(c936.4,1448.21) 936.4,1428.15 ; 944.36,1490.16 ccw(c944.36,1535.95) C17.2@976.74,1503.57 ; 944.36,1490.16 ccw(c944.36,1535.95) C17.2@976.74,1503.57 ; 944.36,1490.16 ccw(c944.36,1535.95) C17.2@976.74,1503.57 ; 951.9,1428.15 cw(c951.9,1393.83) R19.1@976.17,1418.1 ; 951.9,1428.15 ccw(c951.9,1462.47) R19.1@976.17,1438.2 ; 951.9,1428.15 ccw(c951.9,1462.47) R19.1@976.17,1438.2 ; 951.9,1428.15 cw(c951.9,1393.83) R19.1@976.17,1418.1 ; 951.9,1428.15 ccw(c951.9,1462.47) R19.1@976.17,1438.2 ; 951.9,1428.15 cw(c951.9,1393.83) R19.1@976.17,1418.1 ; 953.87,1490.16 cw(c953.87,1457.8) C17.2@976.74,1480.68 ; 953.87,1490.16 cw(c953.87,1457.8) C17.2@976.74,1480.68 ; 953.87,1490.16 cw(c953.87,1457.8) C17.2@976.74,1480.68 ; 961.26,1490.16 ccw(c961.26,1519.05) C17.2@981.69,1498.62 ; 961.26,1490.16 ccw(c961.26,1519.05) C17.2@981.69,1498.62 ; 961.26,1490.16 ccw(c961.26,1519.05) C17.2@981.69,1498.62
  Top Layer w10: R18.1@139.76,390.75 162.4,413.39 ; T1.3@309.06,413.39 v1(188.98,413.39) 162.4,413.39 ; R18.1@140.76,405.39 ccw(c142.91,432.88) 162.4,413.38 ; R18.1@140.76,405.39 ccw(c142.91,432.88) 162.4,413.38 ; R18.1@140.76,405.39 ccw(c142.91,432.88) 162.4,413.38 ; R18.1@152.48,392.72 cw(c178.43,392.72) 160.08,411.06 ; R18.1@152.48,392.72 cw(c178.43,392.72) 160.08,411.06 ; R18.1@152.48,392.72 cw(c178.43,392.72) 160.08,411.06 ; 172.53,413.39 cw(c172.53,396.94) v1@184.16,408.57 ; 172.53,413.39 ccw(c172.53,429.83) v1@184.16,418.2 ; 172.53,413.39 ccw(c172.53,429.83) v1@184.16,418.2 ; 172.53,413.39 cw(c172.53,396.94) v1@184.16,408.57 ; 172.53,413.39 ccw(c172.53,429.83) v1@184.16,418.2 ; 172.53,413.39 cw(c172.53,396.94) v1@184.16,408.57 ; v1@193.79,408.57 cw(c205.42,396.94) 205.42,413.39 ; v1@193.79,408.57 cw(c205.42,396.94) 205.42,413.39 ; v1@193.79,408.57 cw(c205.42,396.94) 205.42,413.39 ; v1@193.79,418.2 ccw(c205.42,429.83) 205.42,413.39 ; v1@193.79,418.2 ccw(c205.42,429.83) 205.42,413.39 ; v1@193.79,418.2 ccw(c205.42,429.83) 205.42,413.39 ; 281.14,413.39 cw(c281.14,387.44) T1.3@299.49,405.79 ; 281.14,413.39 ccw(c281.14,439.33) T1.3@299.49,420.99 ; 281.14,413.39 ccw(c281.14,439.33) T1.3@299.49,420.99 ; 281.14,413.39 cw(c281.14,387.44) T1.3@299.49,405.79 ; 281.14,413.39 ccw(c281.14,439.33) T1.3@299.49,420.99 ; 281.14,413.39 cw(c281.14,387.44) T1.3@299.49,405.79
  Top Layer w15: JP1.1@241.76,1686.02 311.65,1755.91 C19.2@500,1755.91 ; R9.2@946.85,1039.37 946.85,1086.61 ; C17.2@986.22,1490.16 986.22,1520.67 ; v1(1005.91,1540.35) 986.22,1520.67 ; U4.5@1053.15,948.82 1053.15,1013.78 C15.2@1059.06,1019.68 C12.2@1059.06,1086.61 ; JP1.1@241.76,1708.52 ccw(c241.76,1762.84) 280.17,1724.43 ; JP1.1@241.76,1708.52 ccw(c241.76,1762.84) 280.17,1724.43 ; JP1.1@241.76,1708.52 ccw(c241.76,1762.84) 280.17,1724.43 ; JP1.1@264.26,1686.02 cw(c318.58,1686.02) 280.17,1724.43 ; JP1.1@264.26,1686.02 cw(c318.58,1686.02) 280.17,1724.43 ; JP1.1@264.26,1686.02 cw(c318.58,1686.02) 280.17,1724.43 ; 470.58,1755.91 cw(c470.58,1726.49) C19.2@491.38,1747.29 ; 470.58,1755.91 ccw(c470.58,1785.32) C19.2@491.38,1764.52 ; 470.58,1755.91 ccw(c470.58,1785.32) C19.2@491.38,1764.52 ; 470.58,1755.91 cw(c470.58,1726.49) C19.2@491.38,1747.29 ; 470.58,1755.91 ccw(c470.58,1785.32) C19.2@491.38,1764.52 ; 470.58,1755.91 cw(c470.58,1726.49) C19.2@491.38,1747.29 ; R9.2@939.63,1046.59 ccw(c922.19,1064.04) 946.85,1064.04 ; R9.2@939.63,1046.59 ccw(c922.19,1064.04) 946.85,1064.04 ; R9.2@939.63,1046.59 ccw(c922.19,1064.04) 946.85,1064.04 ; 946.85,1064.04 ccw(c971.52,1064.04) R9.2@954.07,1046.59 ; 946.85,1064.04 ccw(c971.52,1064.04) R9.2@954.07,1046.59 ; 946.85,1064.04 ccw(c971.52,1064.04) R9.2@954.07,1046.59 ; C17.2@979.57,1500.74 ccw(c963.52,1516.79) 986.22,1516.79 ; C17.2@979.57,1500.74 ccw(c963.52,1516.79) 986.22,1516.79 ; C17.2@979.57,1500.74 ccw(c963.52,1516.79) 986.22,1516.79 ; 986.22,1520.67 ccw(c1009.89,1520.67) C17.2@995.56,1501.83 ; 986.22,1520.67 ccw(c1009.89,1520.67) C17.2@995.56,1501.83 ; 986.22,1520.67 ccw(c1009.89,1520.67) C17.2@995.56,1501.83 ; C15.2@1050.44,1028.3 ccw(c1029.64,1049.1) 1059.06,1049.1 ; C15.2@1050.44,1028.3 ccw(c1029.64,1049.1) 1059.06,1049.1 ; C15.2@1050.44,1028.3 ccw(c1029.64,1049.1) 1059.06,1049.1 ; C12.2@1050.44,1078 cw(c1029.64,1057.2) 1059.06,1057.2 ; C12.2@1050.44,1078 cw(c1029.64,1057.2) 1059.06,1057.2 ; C12.2@1050.44,1078 cw(c1029.64,1057.2) 1059.06,1057.2 ; 1053.15,976.01 cw(c1102.73,976.01) C15.2@1067.67,1011.07 ; 1053.15,976.01 cw(c1102.73,976.01) C15.2@1067.67,1011.07 ; 1053.15,976.01 cw(c1102.73,976.01) C15.2@1067.67,1011.07 ; 1059.06,1049.1 ccw(c1088.47,1049.1) C15.2@1067.67,1028.3 ; 1059.06,1049.1 ccw(c1088.47,1049.1) C15.2@1067.67,1028.3 ; 1059.06,1049.1 ccw(c1088.47,1049.1) C15.2@1067.67,1028.3 ; 1059.06,1057.2 cw(c1088.47,1057.2) C12.2@1067.67,1078 ; 1059.06,1057.2 cw(c1088.47,1057.2) C12.2@1067.67,1078 ; 1059.06,1057.2 cw(c1088.47,1057.2) C12.2@1067.67,1078
  Top Layer w20: v2(188.98,758.86) v1@1005.91,758.86 ; C18.2@498.03,1143.7 498.03,1217.6 577.68,1297.24 747.05,1297.24 802.17,1242.13 955.71,1242.13 v1(1005.91,1292.32) ; v1(500,1709.65) C19.2@500,1755.91 ; C16.2@818.9,1037.4 818.9,1086.61 946.85,1086.61 v1(1005.91,1086.61) C12.2@1059.06,1086.61 ; v2@199.58,748.25 cw(c225.19,722.65) 225.19,758.86 ; v2@199.58,748.25 cw(c225.19,722.65) 225.19,758.86 ; v2@199.58,748.25 cw(c225.19,722.65) 225.19,758.86 ; v2@199.58,769.46 ccw(c225.19,795.07) 225.19,758.86 ; v2@199.58,769.46 ccw(c225.19,795.07) 225.19,758.86 ; v2@199.58,769.46 ccw(c225.19,795.07) 225.19,758.86 ; C18.2@491.18,1150.55 ccw(c474.65,1167.08) 498.03,1167.08 ; C18.2@491.18,1150.55 ccw(c474.65,1167.08) 498.03,1167.08 ; C18.2@491.18,1150.55 ccw(c474.65,1167.08) 498.03,1167.08 ; C19.2@493.15,1749.06 cw(c476.62,1732.52) 500,1732.52 ; C19.2@493.15,1749.06 cw(c476.62,1732.52) 500,1732.52 ; C19.2@493.15,1749.06 cw(c476.62,1732.52) 500,1732.52 ; 498.03,1167.08 ccw(c521.41,1167.08) C18.2@504.88,1150.55 ; 498.03,1167.08 ccw(c521.41,1167.08) C18.2@504.88,1150.55 ; 498.03,1167.08 ccw(c521.41,1167.08) C18.2@504.88,1150.55 ; 500,1732.52 cw(c523.38,1732.52) C19.2@506.85,1749.06 ; 500,1732.52 cw(c523.38,1732.52) C19.2@506.85,1749.06 ; 500,1732.52 cw(c523.38,1732.52) C19.2@506.85,1749.06 ; C16.2@812.05,1044.25 ccw(c795.52,1060.78) 818.9,1060.78 ; C16.2@812.05,1044.25 ccw(c795.52,1060.78) 818.9,1060.78 ; C16.2@812.05,1044.25 ccw(c795.52,1060.78) 818.9,1060.78 ; 818.9,1060.78 ccw(c842.28,1060.78) C16.2@825.75,1044.25 ; 818.9,1060.78 ccw(c842.28,1060.78) C16.2@825.75,1044.25 ; 818.9,1060.78 ccw(c842.28,1060.78) C16.2@825.75,1044.25 ; 994.4,758.86 ccw(c994.4,773.31) v1@1004.62,763.09 ; 994.4,758.86 ccw(c994.4,773.31) v1@1004.62,763.09 ; 994.4,758.86 ccw(c994.4,773.31) v1@1004.62,763.09 ; 1035.67,1086.61 cw(c1035.67,1063.23) C12.2@1052.21,1079.77 ; 1035.67,1086.61 ccw(c1035.67,1110) C12.2@1052.21,1093.46 ; 1035.67,1086.61 ccw(c1035.67,1110) C12.2@1052.21,1093.46 ; 1035.67,1086.61 cw(c1035.67,1063.23) C12.2@1052.21,1079.77 ; 1035.67,1086.61 ccw(c1035.67,1110) C12.2@1052.21,1093.46 ; 1035.67,1086.61 cw(c1035.67,1063.23) C12.2@1052.21,1079.77
  Bottom Layer w7: v1(916.34,1428.15) 1005.91,1428.15 ; v1@922.22,1422.27 cw(c936.4,1408.09) 936.4,1428.15 ; v1@922.22,1422.27 cw(c936.4,1408.09) 936.4,1428.15 ; v1@922.22,1422.27 cw(c936.4,1408.09) 936.4,1428.15 ; v1@922.22,1434.03 ccw(c936.4,1448.21) 936.4,1428.15 ; v1@922.22,1434.03 ccw(c936.4,1448.21) 936.4,1428.15 ; v1@922.22,1434.03 ccw(c936.4,1448.21) 936.4,1428.15
  Bottom Layer w20: P4.1@98.43,1185.04 98.43,849.41 v2(188.98,758.86) v1(188.98,413.39) ; v1(500,1709.65) 884.84,1709.65 1005.91,1588.58 v1(1005.91,1540.35) 1005.91,1428.15 v1(1005.91,1292.32) v1(1005.91,1086.61) v1(1005.91,761.81) ; P4.1@84.62,1171.23 cw(c51.28,1137.9) 98.43,1137.9 ; P4.1@84.62,1171.23 cw(c51.28,1137.9) 98.43,1137.9 ; P4.1@84.62,1171.23 cw(c51.28,1137.9) 98.43,1137.9 ; 98.43,1137.9 cw(c145.57,1137.9) P4.1@112.23,1171.23 ; 98.43,1137.9 cw(c145.57,1137.9) P4.1@112.23,1171.23 ; 98.43,1137.9 cw(c145.57,1137.9) P4.1@112.23,1171.23 ; 163.37,784.46 cw(c137.76,758.86) v2@173.98,758.86 ; 163.37,784.46 ccw(c188.98,810.07) v2@188.98,773.86 ; 163.37,784.46 ccw(c188.98,810.07) v2@188.98,773.86 ; 163.37,784.46 cw(c137.76,758.86) v2@173.98,758.86 ; 163.37,784.46 ccw(c188.98,810.07) v2@188.98,773.86 ; 163.37,784.46 cw(c137.76,758.86) v2@173.98,758.86 ; v2@178.37,748.25 cw(c152.76,722.65) 188.98,722.65 ; v2@178.37,748.25 cw(c152.76,722.65) 188.98,722.65 ; v2@178.37,748.25 cw(c152.76,722.65) 188.98,722.65 ; 188.98,722.65 cw(c225.19,722.65) v2@199.58,748.25 ; 188.98,722.65 cw(c225.19,722.65) v2@199.58,748.25 ; 188.98,722.65 cw(c225.19,722.65) v2@199.58,748.25
AGND: C3.1 C4.1 C21.1 C22.1 C23.1 C24.1 FB3.2 P2.9 P2.10 P2.11 P2.12 P2.13 P2.14 U2.2 U5.20 | length 6999.4
  Top Layer w6: C22.1@2624.02,1480.33 2624.02,1543.67 C21.1@2623.5,1544.18 2623.5,1630.06 2611.22,1642.34 2611.22,1734.26 U5.20@2676.62,1799.66 ; 2814.96,1362.2 2624.02,1362.2 ; C24.1@2814.96,1480.45 C23.1@2814.96,1544.43 ; C21.1@2611.71,1532.39 cw(c2581.99,1502.67) 2624.02,1502.67 ; C21.1@2611.71,1532.39 cw(c2581.99,1502.67) 2624.02,1502.67 ; C21.1@2611.71,1532.39 cw(c2581.99,1502.67) 2624.02,1502.67 ; C21.1@2611.71,1555.98 ccw(c2583.22,1584.47) 2623.5,1584.47 ; C21.1@2611.71,1555.98 ccw(c2583.22,1584.47) 2623.5,1584.47 ; C21.1@2611.71,1555.98 ccw(c2583.22,1584.47) 2623.5,1584.47 ; C22.1@2612.22,1492.12 ccw(c2583.73,1520.61) 2624.02,1520.61 ; C22.1@2612.22,1492.12 ccw(c2583.73,1520.61) 2624.02,1520.61 ; C22.1@2612.22,1492.12 ccw(c2583.73,1520.61) 2624.02,1520.61 ; C21.1@2615.95,1536.63 cw(c2596.47,1517.15) 2624.02,1517.15 ; C21.1@2615.95,1536.63 cw(c2596.47,1517.15) 2624.02,1517.15 ; C21.1@2615.95,1536.63 cw(c2596.47,1517.15) 2624.02,1517.15 ; C21.1@2615.95,1551.74 ccw(c2597.71,1569.98) 2623.5,1569.98 ; C21.1@2615.95,1551.74 ccw(c2597.71,1569.98) 2623.5,1569.98 ; C21.1@2615.95,1551.74 ccw(c2597.71,1569.98) 2623.5,1569.98 ; C22.1@2616.46,1487.88 ccw(c2598.22,1506.12) 2624.02,1506.12 ; C22.1@2616.46,1487.88 ccw(c2598.22,1506.12) 2624.02,1506.12 ; C22.1@2616.46,1487.88 ccw(c2598.22,1506.12) 2624.02,1506.12 ; 2623.5,1569.98 ccw(c2649.3,1569.98) C21.1@2631.06,1551.74 ; 2623.5,1569.98 ccw(c2649.3,1569.98) C21.1@2631.06,1551.74 ; 2623.5,1569.98 ccw(c2649.3,1569.98) C21.1@2631.06,1551.74 ; 2623.5,1584.47 ccw(c2663.79,1584.47) C21.1@2635.3,1555.98 ; 2623.5,1584.47 ccw(c2663.79,1584.47) C21.1@2635.3,1555.98 ; 2623.5,1584.47 ccw(c2663.79,1584.47) C21.1@2635.3,1555.98 ; 2624.02,1362.21 cw(c2628.72,1357.5) v1@2630.09,1364.01 ; 2624.02,1362.2 ccw(c2620.91,1365.31) v1@2624.56,1367.74 ; 2624.02,1362.21 cw(c2628.72,1357.5) v1@2630.09,1364.01 ; 2624.02,1362.21 ccw(c2620.91,1365.31) v1@2624.56,1367.74 ; 2624.02,1362.21 ccw(c2620.91,1365.31) v1@2624.56,1367.74 ; 2624.02,1362.21 cw(c2628.72,1357.5) v1@2630.09,1364.01 ; 2624.02,1362.2 ccw(c2620.91,1365.31) v1@2624.56,1367.74 ; 2624.02,1362.21 cw(c2628.72,1357.5) v1@2630.09,1364.01 ; 2624.02,1362.21 ccw(c2620.91,1365.31) v1@2624.56,1367.74 ; 2624.02,1362.21 cw(c2628.72,1357.5) v1@2630.09,1364.01 ; 2624.02,1362.2 ccw(c2620.91,1365.31) v1@2624.56,1367.74 ; 2624.02,1362.21 cw(c2628.72,1357.5) v1@2630.09,1364.01 ; 2624.02,1505.14 cw(c2662.55,1505.14) C21.1@2635.3,1532.39 ; 2624.02,1505.14 cw(c2662.55,1505.14) C21.1@2635.3,1532.39 ; 2624.02,1505.14 cw(c2662.55,1505.14) C21.1@2635.3,1532.39 ; 2624.02,1506.12 ccw(c2649.81,1506.12) C22.1@2631.57,1487.88 ; 2624.02,1506.12 ccw(c2649.81,1506.12) C22.1@2631.57,1487.88 ; 2624.02,1506.12 ccw(c2649.81,1506.12) C22.1@2631.57,1487.88 ; 2624.02,1519.62 cw(c2648.06,1519.62) C21.1@2631.06,1536.63 ; 2624.02,1519.62 cw(c2648.06,1519.62) C21.1@2631.06,1536.63 ; 2624.02,1519.62 cw(c2648.06,1519.62) C21.1@2631.06,1536.63 ; 2624.02,1520.61 ccw(c2664.3,1520.61) C22.1@2635.81,1492.12 ; 2624.02,1520.61 ccw(c2664.3,1520.61) C22.1@2635.81,1492.12 ; 2624.02,1520.61 ccw(c2664.3,1520.61) C22.1@2635.81,1492.12 ; v1@2629.63,1370.38 ccw(c2649.38,1390.13) 2649.38,1362.2 ; v1@2629.63,1370.38 ccw(c2649.38,1390.13) 2649.38,1362.2 ; v1@2629.63,1370.38 ccw(c2649.38,1390.13) 2649.38,1362.2 ; v1@2633.75,1370.53 cw(c2642.42,1360.77) 2649.35,1371.83 ; v1@2633.75,1370.53 cw(c2642.42,1360.77) 2649.35,1371.83 ; v1@2633.75,1370.53 cw(c2642.42,1360.77) 2649.35,1371.83 ; v1@2633.88,1374.63 ccw(c2663.86,1404.61) 2663.86,1362.2 ; v1@2633.88,1374.63 ccw(c2663.86,1404.61) 2663.86,1362.2 ; v1@2633.88,1374.63 ccw(c2663.86,1404.61) 2663.86,1362.2 ; v1@2634.17,1364.13 cw(c2636.95,1353.74) 2642.33,1363.05 ; v1@2634.17,1364.13 cw(c2636.95,1353.74) 2642.33,1363.05 ; v1@2634.17,1364.13 cw(c2636.95,1353.74) 2642.33,1363.05 ; v1@2635.93,1364.81 cw(c2643.39,1350.33) 2651.53,1364.43 ; v1@2635.93,1364.81 cw(c2643.39,1350.33) 2651.53,1364.43 ; v1@2635.93,1364.81 cw(c2643.39,1350.33) 2651.53,1364.43 ; v1@2637.74,1366.05 cw(c2647.96,1354.52) 2656.14,1367.57 ; v1@2637.74,1366.05 cw(c2647.96,1354.52) 2656.14,1367.57 ; v1@2637.74,1366.05 cw(c2647.96,1354.52) 2656.14,1367.57 ; v1@2638.12,1378.87 ccw(c2678.35,1419.1) 2678.35,1362.2 ; v1@2638.12,1378.87 ccw(c2678.35,1419.1) 2678.35,1362.2 ; v1@2638.12,1378.87 ccw(c2678.35,1419.1) 2678.35,1362.2 ; v1@2640.39,1370.31 ccw(c2647.25,1368.43) 2643.69,1362.27 ; v1@2640.39,1370.31 ccw(c2647.25,1368.43) 2643.69,1362.27 ; v1@2640.39,1370.31 ccw(c2647.25,1368.43) 2643.69,1362.27 ; v1@2640.4,1374.92 ccw(c2651.99,1378.02) 2645.99,1367.63 ; v1@2640.4,1374.92 ccw(c2651.99,1378.02) 2645.99,1367.63 ; v1@2640.4,1374.92 ccw(c2651.99,1378.02) 2645.99,1367.63 ; 2650.78,1773.82 ccw(c2645.82,1778.78) U5.20@2652.84,1778.78 ; 2650.78,1773.82 ccw(c2645.82,1778.78) U5.20@2652.84,1778.78 ; 2650.78,1773.82 ccw(c2645.82,1778.78) U5.20@2652.84,1778.78 ; 2650.78,1773.83 cw(c2655.74,1768.86) U5.20@2655.74,1775.88 ; 2650.78,1773.83 cw(c2655.74,1768.86) U5.20@2655.74,1775.88 ; 2650.78,1773.83 cw(c2655.74,1768.86) U5.20@2655.74,1775.88 ; C24.1@2803.16,1492.25 ccw(c2774.68,1520.73) 2814.96,1520.73 ; C24.1@2803.16,1492.25 ccw(c2774.68,1520.73) 2814.96,1520.73 ; C24.1@2803.16,1492.25 ccw(c2774.68,1520.73) 2814.96,1520.73 ; C23.1@2803.16,1532.63 cw(c2774.68,1504.15) 2814.96,1504.15 ; C23.1@2803.16,1532.63 cw(c2774.68,1504.15) 2814.96,1504.15 ; C23.1@2803.16,1532.63 cw(c2774.68,1504.15) 2814.96,1504.15 ; C24.1@2807.41,1488.01 ccw(c2789.16,1506.25) 2814.96,1506.25 ; C24.1@2807.41,1488.01 ccw(c2789.16,1506.25) 2814.96,1506.25 ; C24.1@2807.41,1488.01 ccw(c2789.16,1506.25) 2814.96,1506.25 ; C23.1@2807.41,1536.87 cw(c2789.16,1518.63) 2814.96,1518.63 ; C23.1@2807.41,1536.87 cw(c2789.16,1518.63) 2814.96,1518.63 ; C23.1@2807.41,1536.87 cw(c2789.16,1518.63) 2814.96,1518.63 ; 2814.96,1504.15 cw(c2855.24,1504.15) C23.1@2826.76,1532.63 ; 2814.96,1504.15 cw(c2855.24,1504.15) C23.1@2826.76,1532.63 ; 2814.96,1504.15 cw(c2855.24,1504.15) C23.1@2826.76,1532.63 ; 2814.96,1506.25 ccw(c2840.76,1506.25) C24.1@2822.52,1488.01 ; 2814.96,1506.25 ccw(c2840.76,1506.25) C24.1@2822.52,1488.01 ; 2814.96,1506.25 ccw(c2840.76,1506.25) C24.1@2822.52,1488.01 ; 2814.96,1518.63 cw(c2840.76,1518.63) C23.1@2822.52,1536.87 ; 2814.96,1518.63 cw(c2840.76,1518.63) C23.1@2822.52,1536.87 ; 2814.96,1518.63 cw(c2840.76,1518.63) C23.1@2822.52,1536.87 ; 2814.96,1520.73 ccw(c2855.24,1520.73) C24.1@2826.76,1492.25 ; 2814.96,1520.73 ccw(c2855.24,1520.73) C24.1@2826.76,1492.25 ; 2814.96,1520.73 ccw(c2855.24,1520.73) C24.1@2826.76,1492.25
  Top Layer w10: C3.1@2304.13,347.44 2332.09,375.39 U2.2@2372.05,375.39 ; C3.1@2304.13,362.13 ccw(c2304.13,397.58) 2329.2,372.51 ; C3.1@2304.13,362.13 ccw(c2304.13,397.58) 2329.2,372.51 ; C3.1@2304.13,362.13 ccw(c2304.13,397.58) 2329.2,372.51 ; C3.1@2318.82,347.44 cw(c2354.27,347.44) 2329.2,372.51 ; C3.1@2318.82,347.44 cw(c2354.27,347.44) 2329.2,372.51 ; C3.1@2318.82,347.44 cw(c2354.27,347.44) 2329.2,372.51 ; 2348.71,375.39 cw(c2348.71,358.95) U2.2@2360.34,370.58 ; 2348.71,375.39 ccw(c2348.71,391.84) U2.2@2360.34,380.21 ; 2348.71,375.39 ccw(c2348.71,391.84) U2.2@2360.34,380.21 ; 2348.71,375.39 cw(c2348.71,358.95) U2.2@2360.34,370.58 ; 2348.71,375.39 ccw(c2348.71,391.84) U2.2@2360.34,380.21 ; 2348.71,375.39 cw(c2348.71,358.95) U2.2@2360.34,370.58
  Top Layer w15: C3.1@2304.13,347.44 2304.13,319.88 ; FB3.2@2377.95,90.55 2406.5,90.55 ; C4.1@2536.42,347.83 2536.42,309.05 2605.51,239.96 2712.4,239.96 P2.9@2762.4,189.96 ; P2.14@2562.4,89.96 2561.81,90.55 2406.5,90.55 ; C3.1@2295.93,338.43 cw(c2279.06,319.88) 2304.13,319.88 ; C3.1@2295.93,338.43 cw(c2279.06,319.88) 2304.13,319.88 ; C3.1@2295.93,338.43 cw(c2279.06,319.88) 2304.13,319.88 ; 2304.13,319.88 cw(c2329.2,319.88) C3.1@2312.33,338.43 ; 2304.13,319.88 cw(c2329.2,319.88) C3.1@2312.33,338.43 ; 2304.13,319.88 cw(c2329.2,319.88) C3.1@2312.33,338.43 ; 2304.13,319.88 2406.5,217.52 2406.5,90.55 ; FB3.2@2381.41,86.11 cw(c2392.13,75.39) 2392.13,90.55 ; FB3.2@2381.41,86.11 cw(c2392.13,75.39) 2392.13,90.55 ; FB3.2@2381.41,86.11 cw(c2392.13,75.39) 2392.13,90.55 ; FB3.2@2381.41,94.99 ccw(c2392.13,105.71) 2392.13,90.55 ; FB3.2@2381.41,94.99 ccw(c2392.13,105.71) 2392.13,90.55 ; FB3.2@2381.41,94.99 ccw(c2392.13,105.71) 2392.13,90.55 ; 2507.8,90.55 cw(c2507.8,35.36) P2.14@2546.83,74.38 ; 2507.8,90.55 cw(c2507.8,35.36) P2.14@2546.83,74.38 ; 2507.8,90.55 cw(c2507.8,35.36) P2.14@2546.83,74.38 ; 2510.65,90.55 ccw(c2510.65,141.71) P2.14@2546.83,105.54 ; 2510.65,90.55 ccw(c2510.65,141.71) P2.14@2546.83,105.54 ; 2510.65,90.55 ccw(c2510.65,141.71) P2.14@2546.83,105.54 ; C4.1@2527.8,339.22 cw(c2507,318.42) 2536.42,318.42 ; C4.1@2527.8,339.22 cw(c2507,318.42) 2536.42,318.42 ; C4.1@2527.8,339.22 cw(c2507,318.42) 2536.42,318.42 ; 2536.42,318.42 cw(c2565.83,318.42) C4.1@2545.03,339.22 ; 2536.42,318.42 cw(c2565.83,318.42) C4.1@2545.03,339.22 ; 2536.42,318.42 cw(c2565.83,318.42) C4.1@2545.03,339.22 ; 2724.8,227.56 cw(c2687.2,189.96) P2.9@2740.37,189.96 ; 2724.8,227.56 ccw(c2762.4,265.17) P2.9@2762.4,211.99 ; 2724.8,227.56 ccw(c2762.4,265.17) P2.9@2762.4,211.99 ; 2724.8,227.56 cw(c2687.2,189.96) P2.9@2740.37,189.96 ; 2724.8,227.56 ccw(c2762.4,265.17) P2.9@2762.4,211.99 ; 2724.8,227.56 cw(c2687.2,189.96) P2.9@2740.37,189.96 ; 2736.28,205.25 ccw(c2767.23,213.54) P2.9@2760.8,182.15 ; 2736.28,205.25 ccw(c2767.23,213.54) P2.9@2760.8,182.15 ; 2736.28,205.25 ccw(c2767.23,213.54) P2.9@2760.8,182.15 ; 2747.11,216.09 cw(c2738.82,185.13) P2.9@2770.21,191.56 ; 2747.11,216.09 cw(c2738.82,185.13) P2.9@2770.21,191.56 ; 2747.11,216.09 cw(c2738.82,185.13) P2.9@2770.21,191.56
  Top Layer w39.37: P2.14@2562.4,89.96 P2.12@2662.4,89.96 P2.10@2762.4,89.96 P2.9@2762.4,189.96 P2.11@2662.4,189.96 P2.13@2562.4,189.96
  Bottom Layer w39.37: P2.13@2562.4,189.96 2534.45,217.91 2534.45,1072.64 2631.89,1170.08 v1(2631.89,1372.64) ; 2534.45,281.21 ccw(c2653.65,281.21) P2.13@2569.36,196.92 ; 2534.45,281.21 ccw(c2653.65,281.21) P2.13@2569.36,196.92 ; 2534.45,281.21 ccw(c2653.65,281.21) P2.13@2569.36,196.92
AIN_1: R13.2 R14.2 U3.10 | length 929.9
  Top Layer w7: U3.10@730.31,1214.57 730.31,1159.45 770.67,1119.09 848.43,1119.09 882.87,1153.54 R14.2@1057.09,1153.54 ; 1022.76,1153.54 cw(c1022.76,1119.22) R14.2@1047.03,1143.49 ; 1022.76,1153.54 ccw(c1022.76,1187.87) R14.2@1047.03,1163.6 ; 1022.76,1153.54 ccw(c1022.76,1187.87) R14.2@1047.03,1163.6 ; 1022.76,1153.54 cw(c1022.76,1119.22) R14.2@1047.03,1143.49 ; 1022.76,1153.54 ccw(c1022.76,1187.87) R14.2@1047.03,1163.6 ; 1022.76,1153.54 cw(c1022.76,1119.22) R14.2@1047.03,1143.49
  Top Layer w10: R14.2@1057.09,1153.54 R13.2@1057.09,1219.49 ; R14.2@1048.09,1164.5 ccw(c1026.39,1186.21) 1057.09,1186.21 ; R14.2@1048.09,1164.5 ccw(c1026.39,1186.21) 1057.09,1186.21 ; R14.2@1048.09,1164.5 ccw(c1026.39,1186.21) 1057.09,1186.21 ; R13.2@1048.09,1208.53 cw(c1026.39,1186.82) 1057.09,1186.82 ; R13.2@1048.09,1208.53 cw(c1026.39,1186.82) 1057.09,1186.82 ; R13.2@1048.09,1208.53 cw(c1026.39,1186.82) 1057.09,1186.82 ; 1057.09,1186.21 ccw(c1087.79,1186.21) R14.2@1066.08,1164.5 ; 1057.09,1186.21 ccw(c1087.79,1186.21) R14.2@1066.08,1164.5 ; 1057.09,1186.21 ccw(c1087.79,1186.21) R14.2@1066.08,1164.5 ; 1057.09,1186.82 cw(c1087.79,1186.82) R13.2@1066.08,1208.53 ; 1057.09,1186.82 cw(c1087.79,1186.82) R13.2@1066.08,1208.53 ; 1057.09,1186.82 cw(c1087.79,1186.82) R13.2@1066.08,1208.53